# Altium PCB CSPS.PcbDoc
Units mm, origin at the board's own origin, x right, y up, seen from the top; angles counter-clockwise.
Board outline 86 x 36 mm, 2 copper layers (Top Layer, Bottom Layer); 10 components, 10 nets, 98 pads, 0 vias.
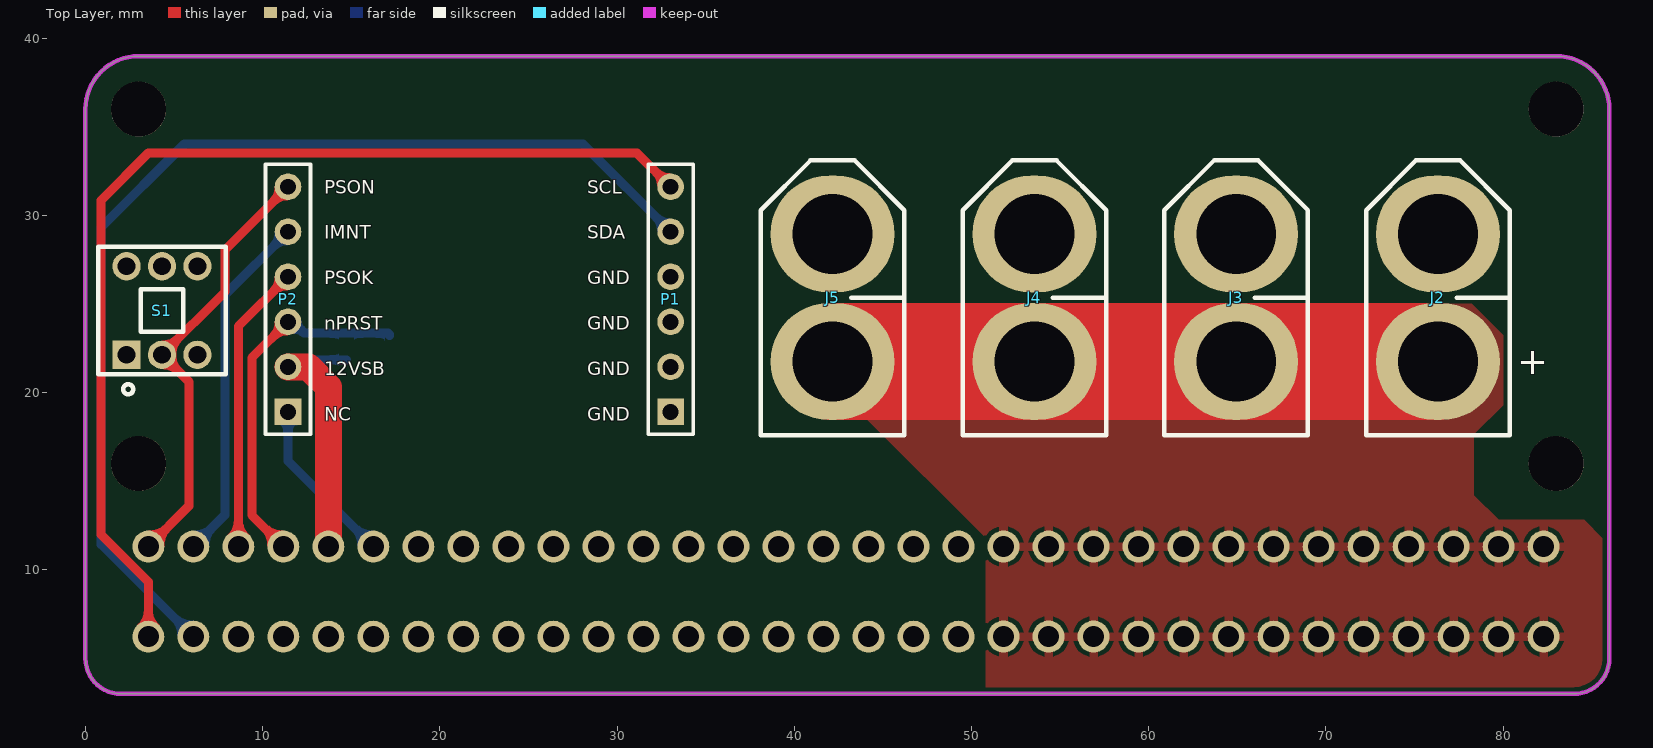
[diagram p0: Top Layer view]
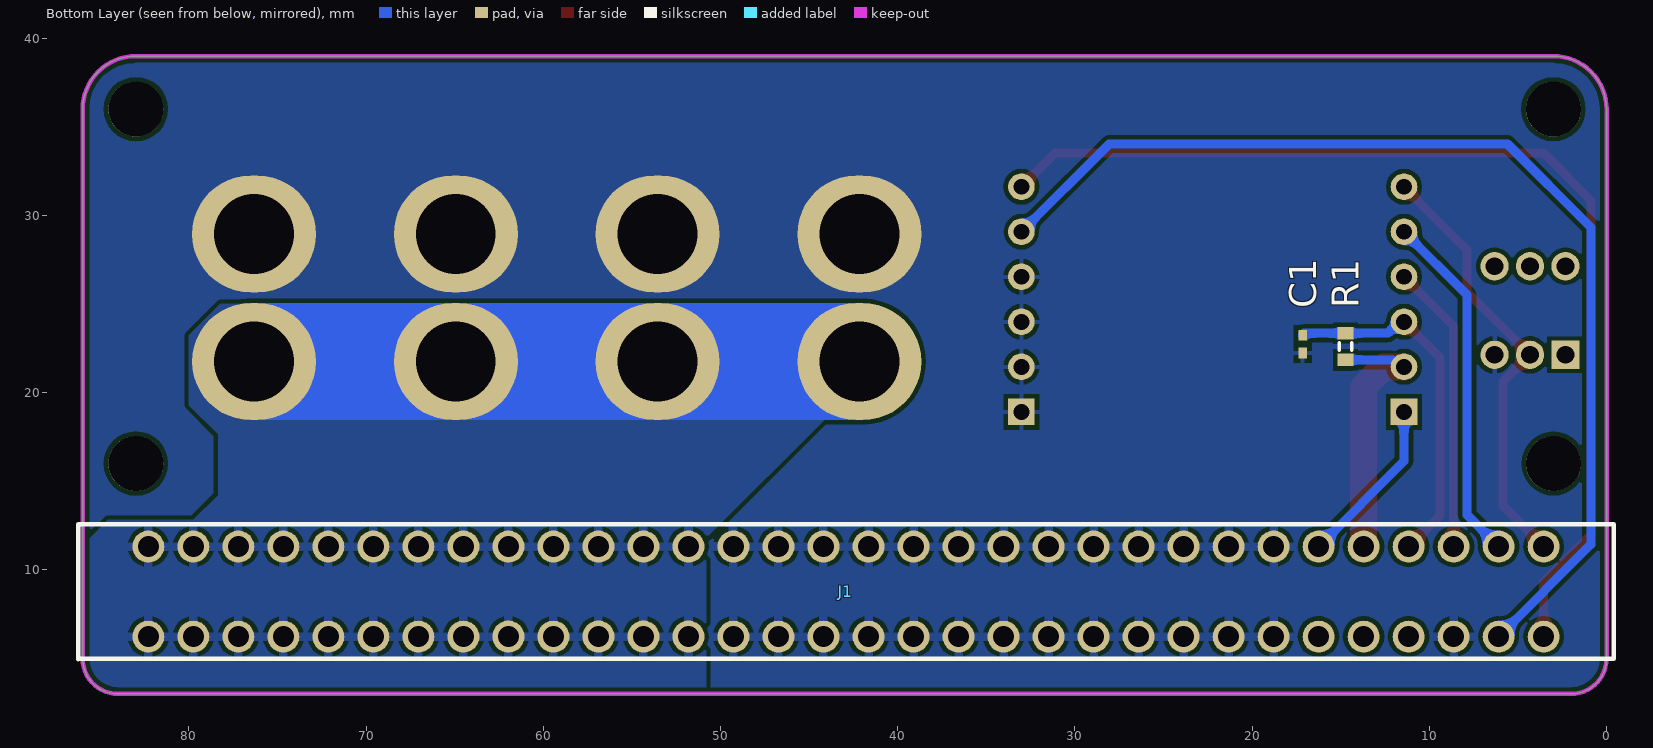
[diagram p1: Bottom Layer view, seen from below]
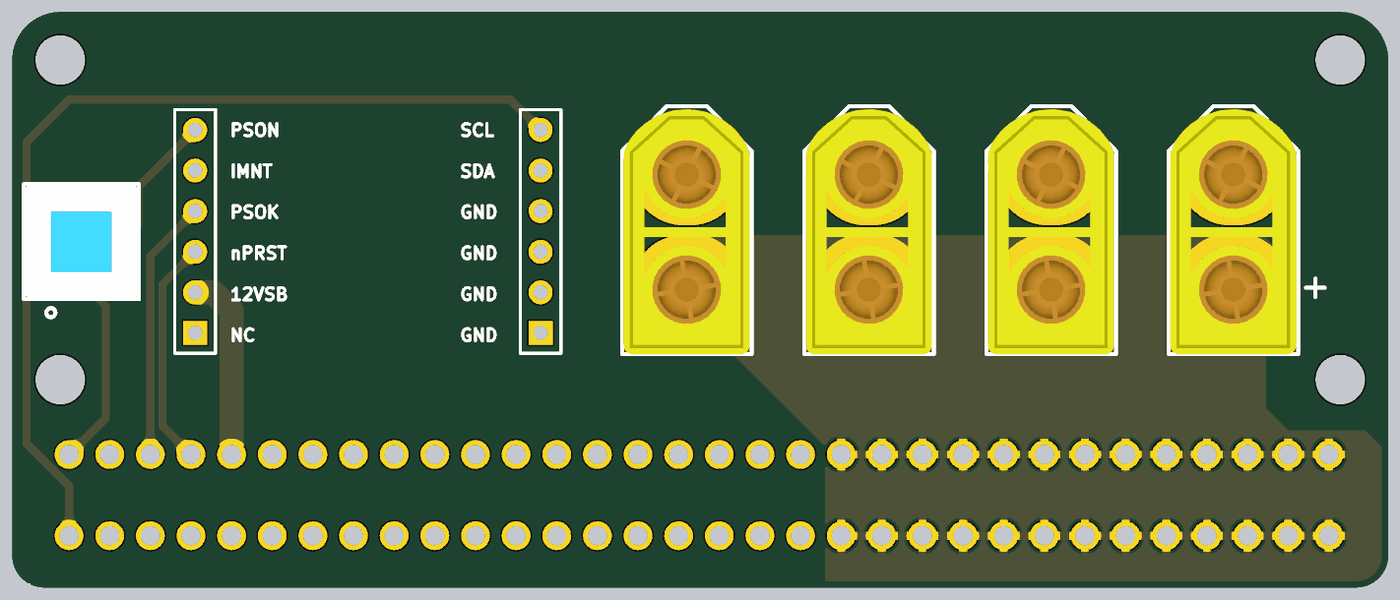
[diagram p2: 3D render of the assembled board from above, using the file's embedded part models]

## Layer stack, top to bottom
Top Solder: solder mask 0.0102, Solder Resist, Dk 3.5
Top Layer: signal copper 0.0356
Dielectric 1: dielectric 0.32, FR-4, Dk 4.8
Bottom Layer: signal copper 0.0356
Bottom Solder: solder mask 0.0102, Solder Resist, Dk 3.5

## Board outline
2,3 cw(c2,5) 0,5 0,36 cw(c3,36) 3,39 83,39 cw(c83,36) 86,36 86,5 cw(c84,5) 84,3

## Design rules (kind name [scope] priority, off if disabled: settings)
Clearance [All] p1: gap=0.254 ignorepadtopadclearanceinfootprint=FALSE except(0: Arc-Hole Track-Hole SMDPad-Hole THPad-Hole Via-Hole Fill-Hole Poly-Hole Region-Hole Text-Hole)
PlaneConnect PlaneConnect_1 [All] p1: planeconnectstyle=Relief reliefexpansion=0.508 reliefentries=4 reliefconductorwidth=0.254 reliefairgap=0.254
PolygonConnect GND_XT60 [InNet('GND') vs HasFootprint('XT60PB')] p1: connectstyle=Direct reliefconductorwidth=0.254 reliefentries=4 polygonreliefangle="90 Angle" airgapwidth=0.254
PolygonConnect GND_CSPS [InNet('GND') vs HasFootprint('CSPSCON2')] p2: connectstyle=Relief reliefconductorwidth=0.508 reliefentries=4 polygonreliefangle="90 Angle" airgapwidth=0.254
PolygonConnect 12V_CSPS [InNet('+12') vs HasFootprint('CSPSCON2')] p3: connectstyle=Relief reliefconductorwidth=0.508 reliefentries=4 polygonreliefangle="90 Angle" airgapwidth=0.254
PolygonConnect 12V_XT60 [InNet('+12') vs HasFootprint('XT60PB')] p4: connectstyle=Direct reliefconductorwidth=0.508 reliefentries=4 polygonreliefangle="90 Angle" airgapwidth=0.254
PolygonConnect [All] p5: connectstyle=Relief reliefconductorwidth=0.254 reliefentries=4 polygonreliefangle="90 Angle" airgapwidth=0.254
RoutingVias [All] p1: holewidth=0.711 width=1.27 viastyle="Through Hole" minholewidth=0.711 minwidth=1.27 maxholewidth=0.711 maxwidth=1.27
SolderMaskExpansion [All] p1: expansion=0.102 istentingtop=FALSE
Width POWER [InNet('+12')] p1: maxlimit=25.4 minlimit=0.254 preferedwidth=5.08
Width [All] p2: maxlimit=3.048 minlimit=0.152 preferedwidth=0.508 minimp=50.000000 maximp=50.000000 favimp=50.000000
29 further rules are at their usual default settings.

## Classes and differential pairs
component class CSPS: C1 J1 P1 P2 R1 S1

## Components (designator, comment, footprint, x,y, rotation, side; value= is the part's Value field where it differs from the comment)
C1 "Cap" 0402 17.145,22.741 r90 bottom value=100nF
J1 "CSPSCON" CSPSCON2 48,7 r180 bottom
J2 "PowerCon" XT60PB 80.377,33.106 r180 top
J3 "PowerCon" XT60PB 68.989,33.106 r180 top
J4 "PowerCon" XT60PB 57.602,33.106 r180 top
J5 "PowerCon" XT60PB 46.214,33.106 r180 top
P1 "Header 6" HDR1X6 33.02,18.923 r90 top
P2 "Header 6" HDR1X6 11.43,18.923 r90 top
R1 "Res2" J1-0603 14.732,22.606 r270 bottom value=22K
S1 "SW0" SW_TH_6P-7x7 4.318,24.638 r0 top

## Footprints (in the part's own frame and the unit in brackets; to place one, negate y for a bottom-side part, rotate by r counter-clockwise, add the part's x,y. Pads: shape width x height; smd on the part's side, far side on the other; paste and mask are expansions set on the pad)
0402 [mm] "Chip Capacitor, Body 1.0x0.5mm, IPC High Density"
  rect 0.6x0.5 smd: 1(-0.5,0) 2(0.5,0)
  body extent -0.55,-0.3 0.55,0.3, height 1.3
CSPSCON2 [mm] "WINGTAT"
  round 1.8 hole 1.2: 1(-34.29,-0.762) 2(-31.75,-0.762) 3(-29.21,-0.762) 4(-26.67,-0.762) 5(-24.13,-0.762) 6(-21.59,-0.762) 7(-19.05,-0.762) 8(-16.51,-0.762) 9(-13.97,-0.761) 10(-11.43,-0.762) 11(-8.89,-0.761) 12(-6.35,-0.761) 13(-3.81,-0.761) 14(-1.27,-0.762) 15(1.27,-0.762) 16(3.81,-0.762) 17(6.35,-0.762) 18(8.89,-0.762) 19(11.43,-0.762) 20(13.97,-0.762) 21(16.51,-0.762) 22(19.05,-0.762) 23(21.59,-0.762) 24(24.13,-0.762) 25(26.67,-0.762) 26(29.21,-0.762) 27(31.75,-0.762) 28(34.29,-0.762) 29(36.83,-0.762) 30(39.37,-0.762) 31(41.91,-0.762) 32(44.45,-0.762) 33(44.45,4.318) 34(41.91,4.318) 35(39.37,4.318) 36(36.83,4.318) 37(34.29,4.318) 38(31.75,4.318) 39(29.21,4.318) 40(26.67,4.318) 41(24.13,4.318) 42(21.59,4.318) 43(19.05,4.318) 44(16.51,4.318) 45(13.97,4.318) 46(11.43,4.318) 47(8.89,4.318) 48(6.35,4.318) 49(3.81,4.318) 50(1.268,4.318) 51(-1.27,4.318) 52(-3.81,4.318) 53(-6.35,4.318) 54(-8.89,4.318) 55(-11.43,4.318) 56(-13.97,4.318) 57(-16.51,4.318) 58(-19.05,4.318) 59(-21.59,4.318) 60(-24.13,4.318) 61(-26.67,4.318) 62(-29.21,4.318) 63(-31.75,4.318) 64(-34.29,4.318)
  silkscreen extent -38.26,-2.06 48.42,5.58
HDR1X6 [mm] "Connector; Header; 6 Position"
  rect 1.5x1.5 hole 0.9: 1(0,0)
  round 1.5 hole 0.9: 2(2.54,0) 3(5.08,0) 4(7.62,0) 5(10.16,0) 6(12.7,0)
  silkscreen extent -1.27,-1.27 13.97,1.27
J1-0603 [mm] "Chip Resistor, Body 1.6x0.8mm, IPC High Density"
  rect 0.7x0.9 smd: 1(-0.75,0) 2(0.75,0)
  silkscreen extent -0.2,-0.35 0.2,0.35, body extent -0.85,-0.48 0.85,0.48, height 0.9
SW_TH_6P-7x7 [mm]
  rect 1.6x1.6 hole 1: 1(-2,-2.5)
  round 1.6 hole 1: 2(0,-2.5) 3(2,-2.5) 4(-2,2.5) 5(0,2.5) 6(2,2.5)
  silkscreen extent -3.6,-4.73 3.6,3.6, body extent -3.5,-3.5 3.5,3.5, height 12.7
XT60PB [mm] "XT60PB"
  rrect100% 7x6.6 hole 4.5: 1(4.05,11.35) 2(4.05,4.15)
  silkscreen extent 0,0 8.1,15.5, body extent 0.11,0.18 8.01,15.52, height 13.54

## Part data
C1: "Capacitor", LatestRevisionDate=17-Jul-2002, LatestRevisionNote="Re-released for DXP Platform.", PackageDescription="Radial Cap, Thru-Hole; 2 Leads; 0.3 in Pin Spacing", PackageReference=RAD-0.3, Published=8-Jun-2000, Publisher="Altium Limited"
J1: "2.54 x 64Pin Common Slot Power Supply Connector"
J2 J3 J4 J5: "2 Pin Power Connector"
P1 P2: "Header, 6-Pin", LatestRevisionDate=17-Jul-2002, LatestRevisionNote="Re-released for DXP Platform.", Publisher="Altium Limited"
R1: "Resistor", LatestRevisionDate=17-Jul-2002, LatestRevisionNote="Re-released for DXP Platform.", PackageDescription="Axial Device, Thru-Hole; 2 Leads; 0.4 in Pin Spacing", PackageReference=AXIAL-0.4, Published=8-Jun-2000, Publisher="Altium Limited"
S1: "Latching Switch."

## Free pads (board coordinates)
  round 3.1 hole 3.1 unplated: ""(3,16) ""(3,36) ""(83,16) ""(83,36)

## Nets (pads, with @x,y where several pads share a name; then routed paths per layer and width w, separated by ;. In a path a pad name is that pad's centre, name@x,y a point inside that pad or via, vN(x,y) a via of type N, cw(c..) or ccw(c..) an arc to the next point about the centre after c; other vN are vias at no path point)
12VSB: J1.37 P2.2 R1.2 | length 15.2
  Top Layer w1.524: P2.2 12.573,21.463 13.71,20.326 J1.37
  Bottom Layer w0.508: P2.2 11.698,21.463 12.091,21.856 R1.2
+12: J1.1 J1.2 J1.3 J1.4 J1.5 J1.6 J1.7 J1.8 J1.9 J1.10 J1.11 J1.12 J1.13 J1.52 J1.53 J1.54 J1.55 J1.56 J1.57 J1.58 J1.59 J1.60 J1.61 J1.62 J1.63 J1.64 J2.1 J3.1 J4.1 J5.1 | length 68.3
  Top Layer w6.6: J5.1 J4.1 J3.1 J2.1
  Bottom Layer w6.6: J5.1 J4.1 J3.1 J2.1
ADC_OUT: J1.34 P2.5 | length 20
  Bottom Layer w0.508: J1.34 7.874,13.102 7.874,25.527 P2.5
GND: C1.1 J1.14 J1.15 J1.16 J1.17 J1.18 J1.19 J1.20 J1.21 J1.22 J1.23 J1.24 J1.25 J1.26 J1.30 J1.39 J1.40 J1.41 J1.42 J1.43 J1.44 J1.45 J1.46 J1.47 J1.48 J1.49 J1.50 J1.51 J2.2 J3.2 J4.2 J5.2 P1.1 P1.2 P1.3 P1.4 S1.3
NC38: J1.38 P2.1 | length 9.6
  Bottom Layer w0.508: P2.1 11.43,16.138 J1.38
nPRST: C1.2 J1.36 P2.3 R1.1 | length 20.3
  Top Layer w0.508: J1.36 9.392,13.096 9.392,21.965 P2.3
  Bottom Layer w0.508: P2.3 11.698,24.003 12.345,23.356 R1.1 17.072,23.356 17.145,23.283 C1.2
PSOK: J1.35 P2.4 | length 16.4
  Top Layer w0.508: J1.35 8.63,23.743 P2.4
PSON: J1.33 P2.6 S1.2 | length 24.8
  Top Layer w0.508: J1.33 5.842,13.61 5.842,20.614 S1.2 7.884,25.704 7.884,28.077 P2.6
SCL: J1.32 P1.6 | length 82.4
  Top Layer w0.508: J1.32 3.55,9.327 ; P1.6 31.115,33.528 3.556,33.528 0.889,30.861 ; 0.889,11.988 3.55,9.327 ; 0.889,11.988 3.55,9.327 ; 0.889,11.988 0.889,30.861 ; 0.889,11.988 0.889,30.861
SDA: J1.31 P1.5 | length 61.4
  Bottom Layer w0.508: J1.31 0.889,11.439 0.889,29.337 5.588,34.036 28.067,34.036 P1.5
pads on no net: J1.27 J1.28 J1.29 S1.1 S1.4 S1.5 S1.6

## Polygon pours and split planes (outlines as drawn)
GND on Bottom Layer "GND_L02_P004" (solid, remove dead copper, pour order 4): -1.778,44.45 2.921,39.751 97.663,39.751 97.663,-6.985 95.631,-9.017 92.583,-5.969 -5.969,-5.969
+12 on Bottom Layer "+12_L02_P000" (solid, remove dead copper, pour order 0): 50.8,11.811 44.069,18.542 50.546,25.019 78.232,25.019 80.01,23.241 80.01,19.304 78.359,17.653 78.359,14.224 79.756,12.827 84.582,12.827 86.868,10.541 86.868,1.524 85.725,2.667 50.8,2.667
+12 on Top Layer "+12_L01_P002" (solid, remove dead copper, pour order 2): 50.8,11.811 44.069,18.542 50.546,25.019 78.232,25.019 80.01,23.241 80.01,19.304 78.359,17.653 78.359,14.224 79.756,12.827 84.582,12.827 86.868,10.541 86.868,1.524 85.725,2.667 50.8,2.667

## Keep-outs
Keep-Out Layer:
  the board outline again, w0.254

## Silkscreen, mask and mechanical layers (free items; w line width, h text height)
Top Overlay:
  text "PSON" at 13.462,31.242 h0.76
  text "SCL" at 28.321,31.242 h0.76
  text "IMNT" at 13.462,28.677 h0.76
  text "SDA" at 28.321,28.677 h0.76
  text "PSOK" at 13.462,26.111 h0.76
  text "GND" at 28.321,26.111 h0.76
  text "nPRST" at 13.462,23.546 h0.76
  text "GND" at 28.321,23.546 h0.76
  text "12VSB" at 13.462,20.98 h0.76
  text "GND" at 28.321,20.98 h0.76
  text "NC" at 13.462,18.415 h0.76
  text "GND" at 28.321,18.415 h0.76

## Text inside footprints (layer, text, board x,y; h text height)
J2: Top Overlay "+" at 82.55,22.352 h1.52 r180